# Altium PCB UPCNSL_ABS_RF_POL.PcbDoc
Units mm, origin at the board's own origin, x right, y up, seen from the top; angles counter-clockwise.
Board outline 40 x 40 mm, 2 copper layers (Top Layer, Bottom Layer); 24 components, 15 nets, 81 pads, 49 vias.
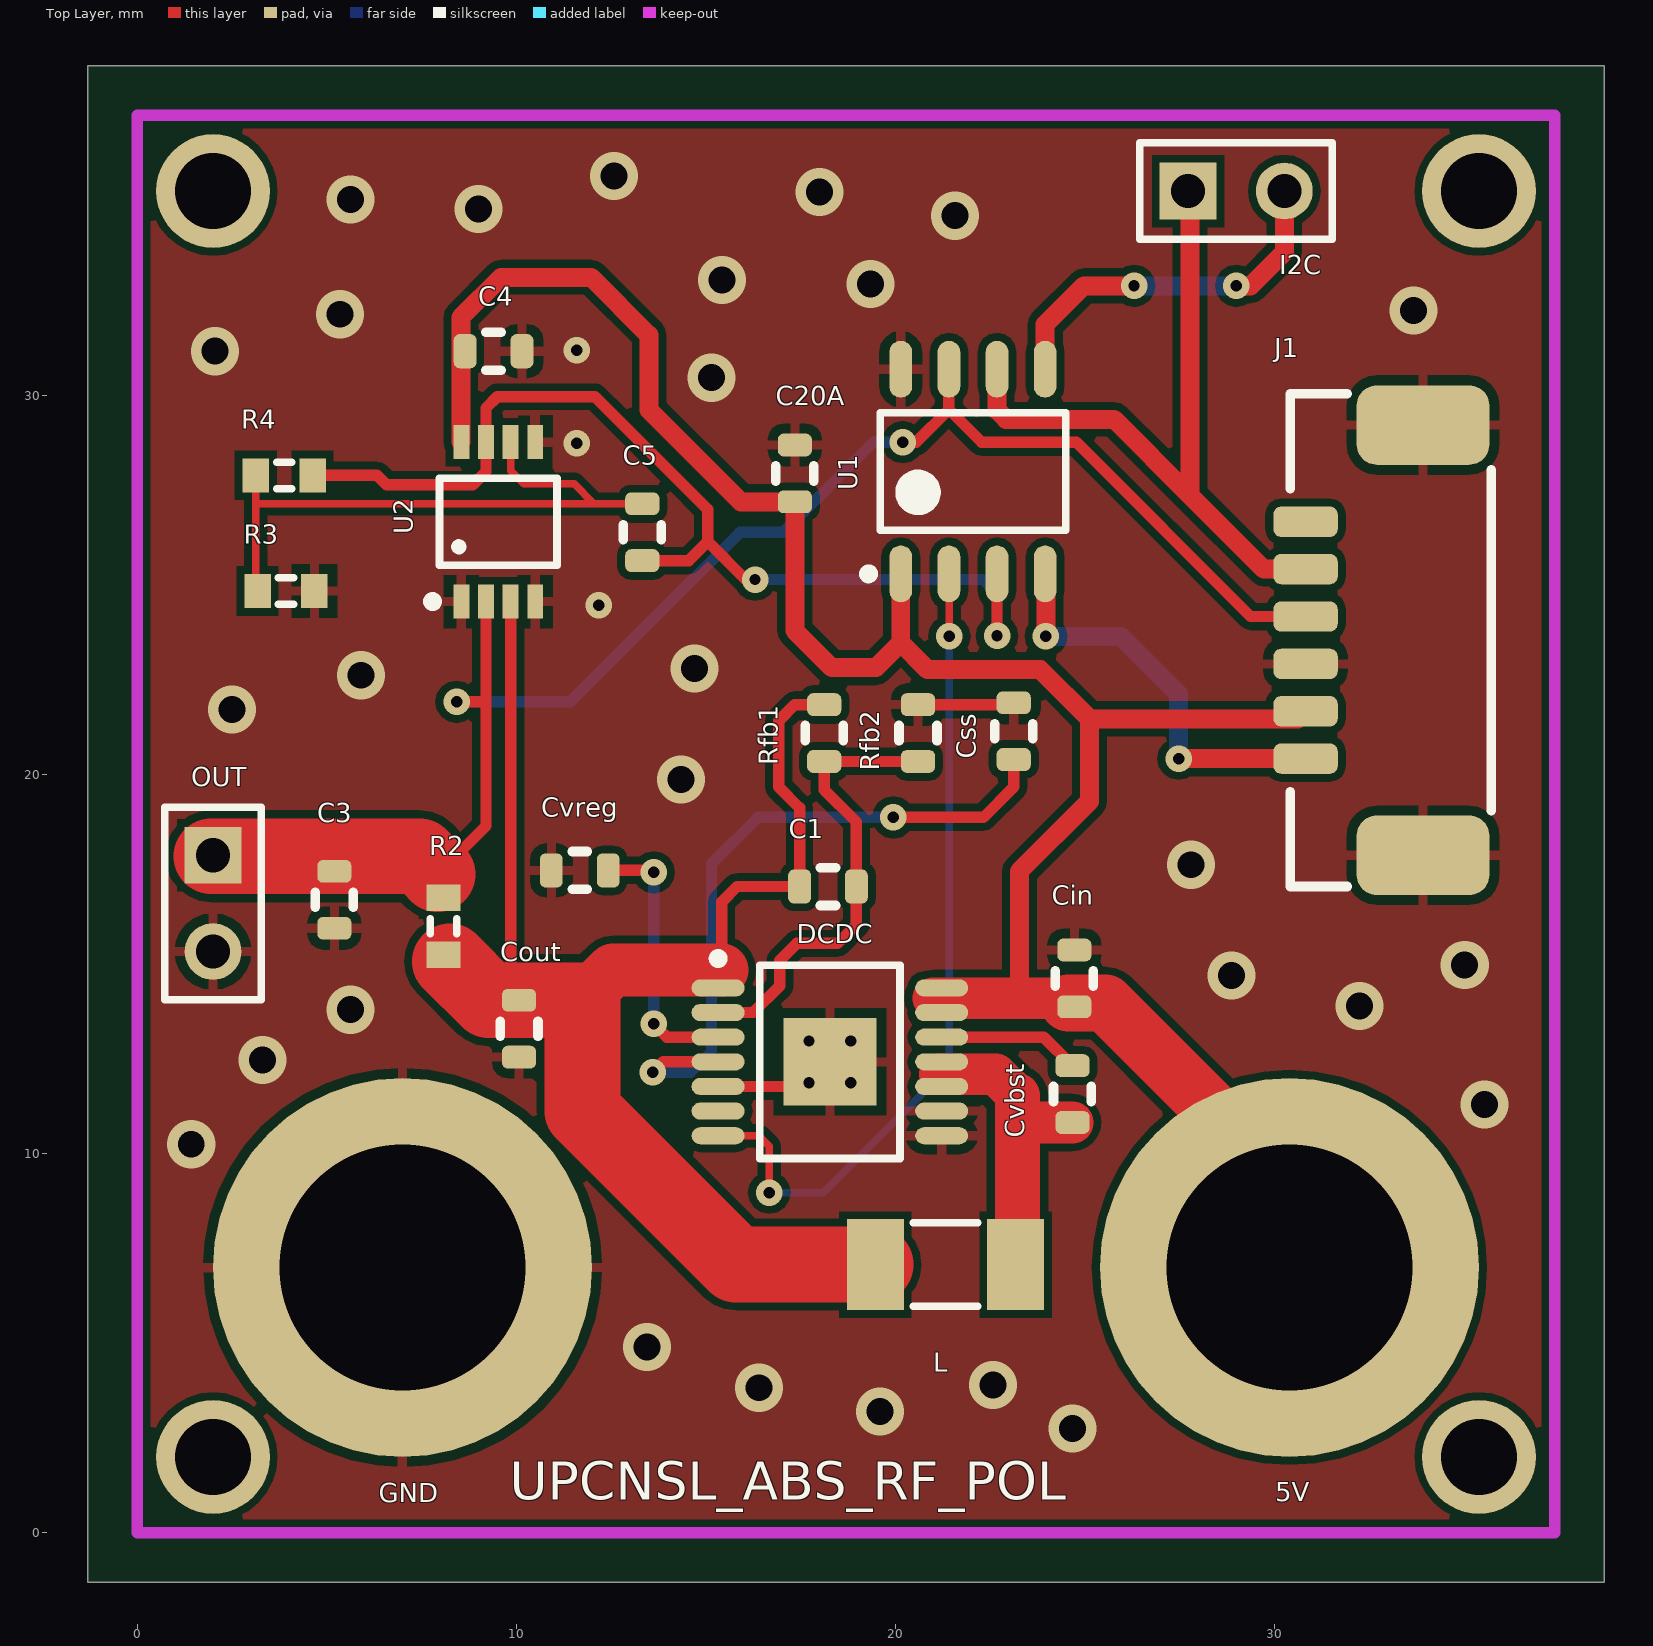
[diagram p0: Top Layer view]
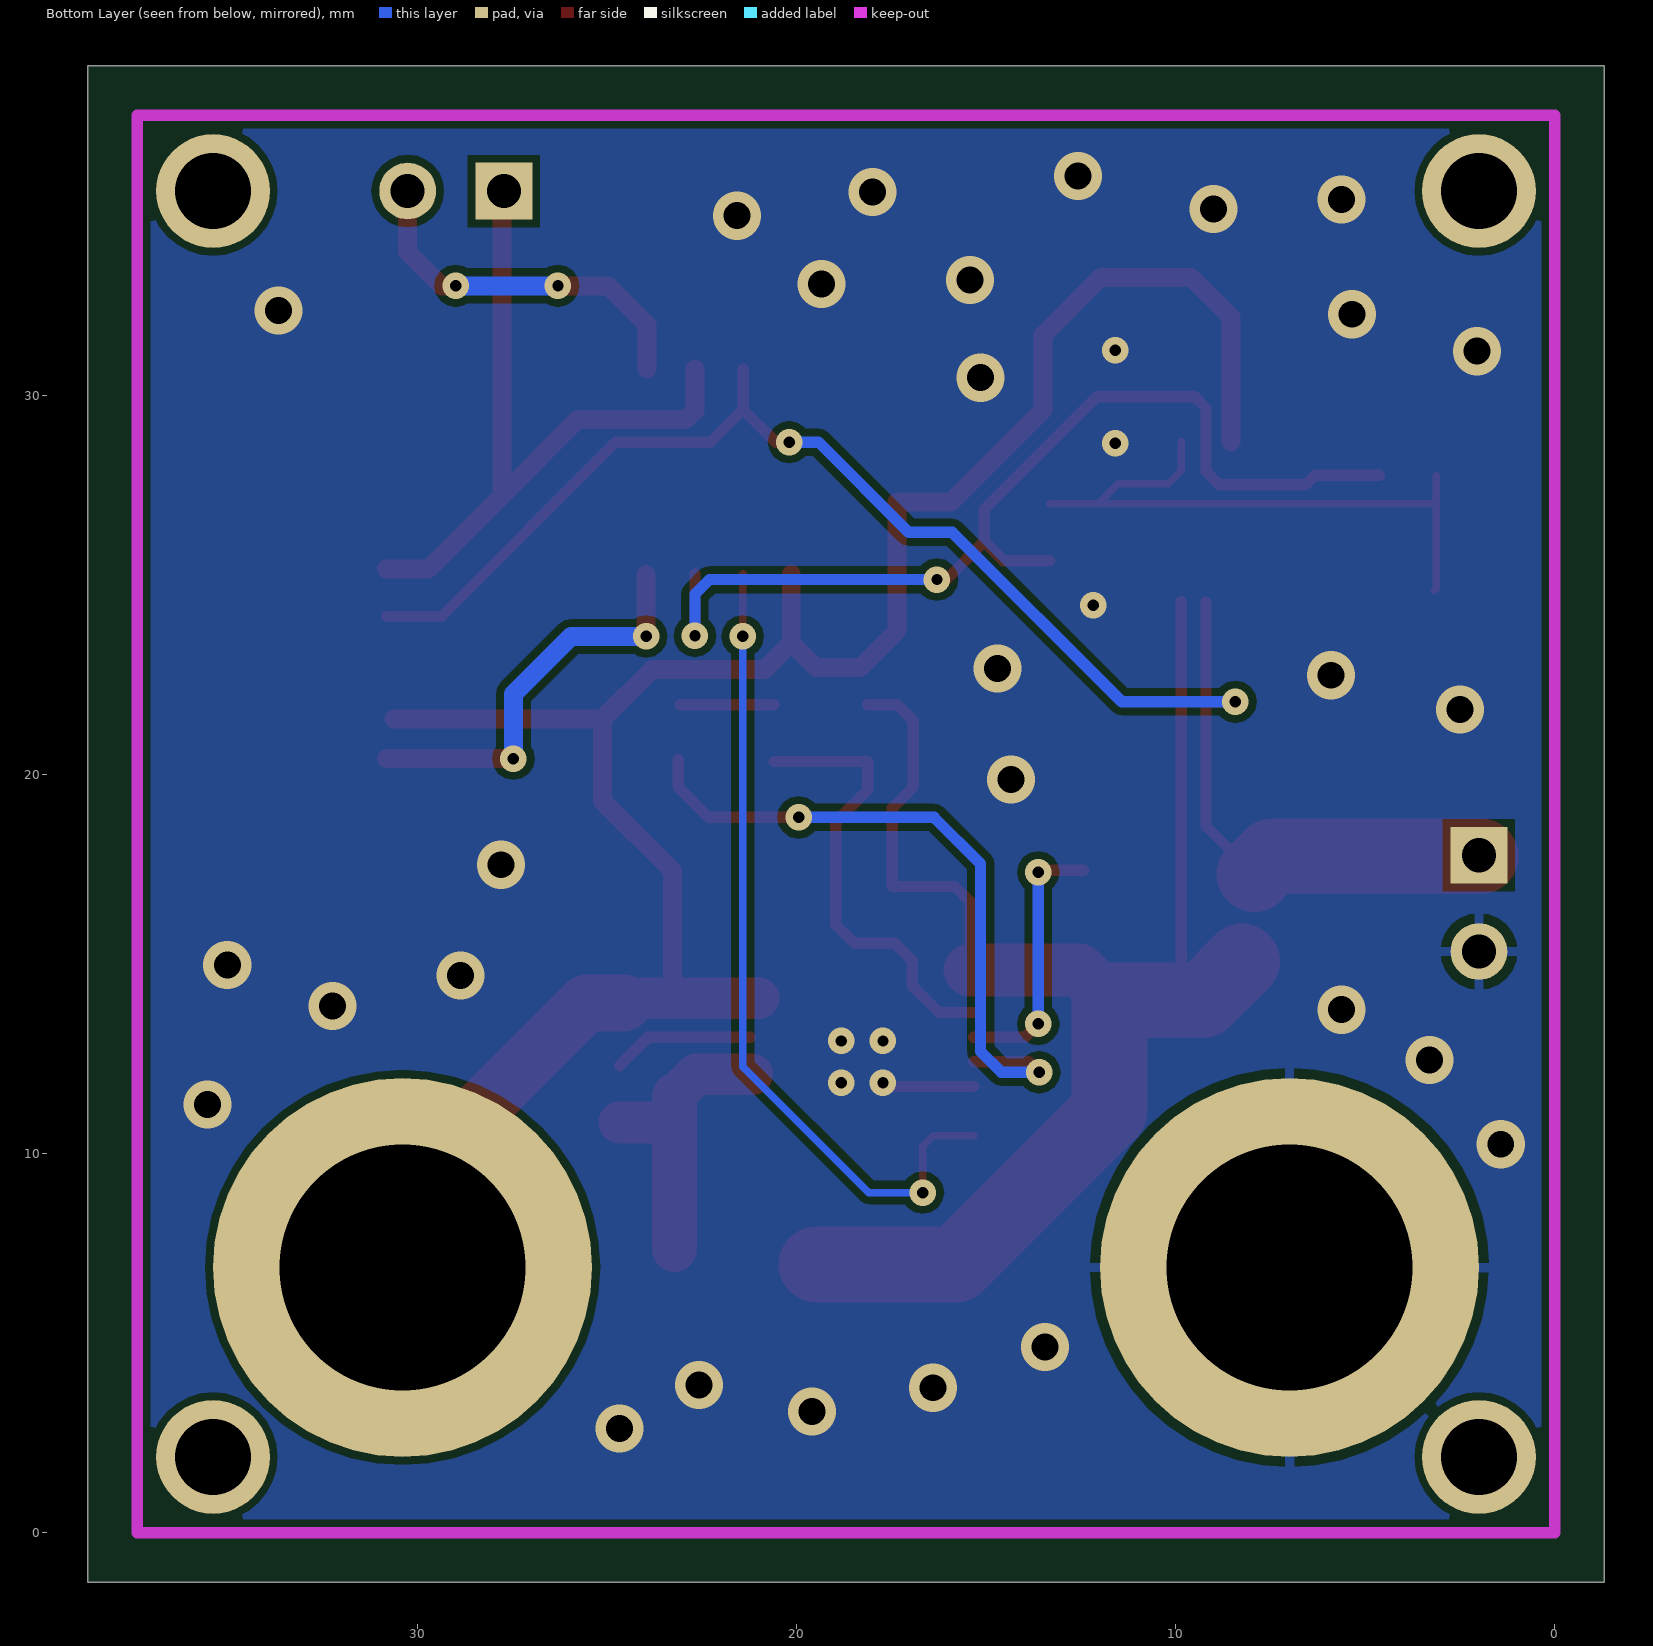
[diagram p1: Bottom Layer view, seen from below]
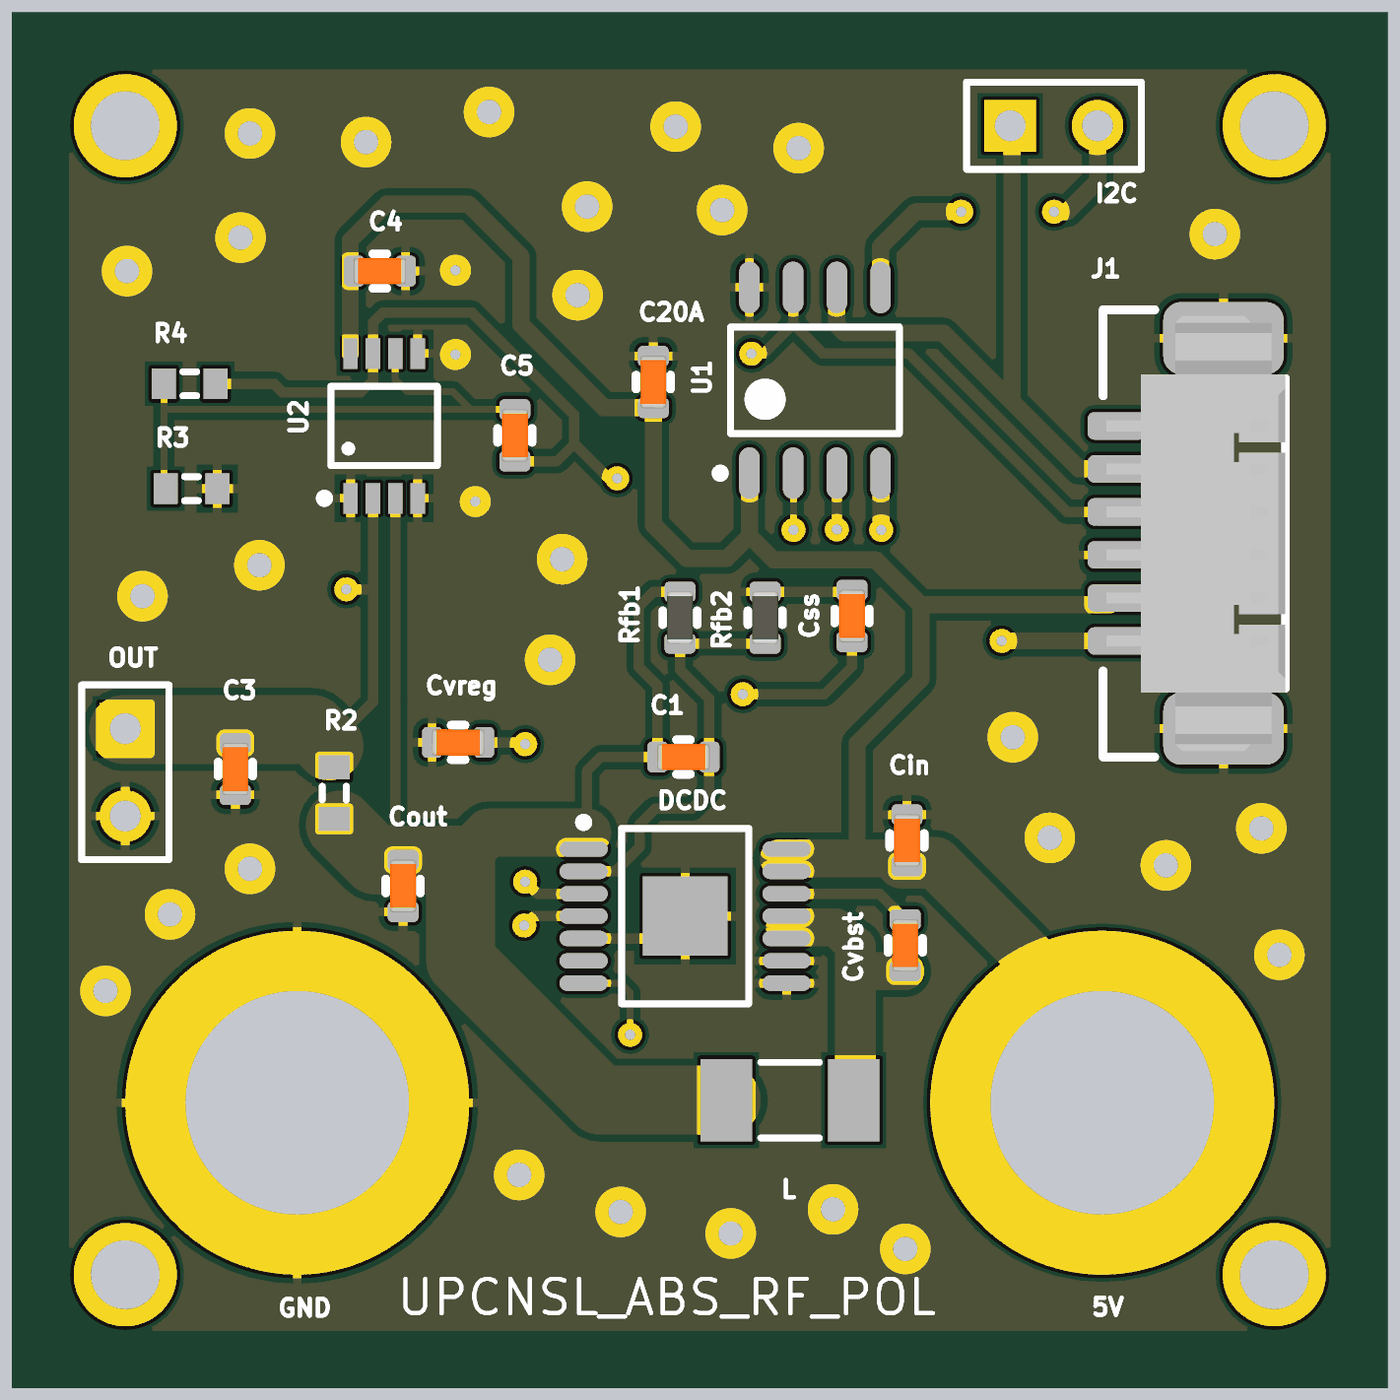
[diagram p2: 3D render of the assembled board from above, using the file's embedded part models]

## Layer stack, top to bottom
Top Solder: solder mask 0.0102, Solder Resist, Dk 3.5
Top Layer: signal copper 0.0356
Dielectric 1: dielectric 0.32, FR-4, Dk 4.8
Bottom Layer: signal copper 0.0356
Bottom Solder: solder mask 0.0102, Solder Resist, Dk 3.5

## Board outline
-1.3,-1.3 38.7,-1.3 38.7,38.7 -1.3,38.7

## Design rules (kind name [scope] priority, off if disabled: settings)
Clearance [All] p1: gap=0.2
HoleSize [All] p1: absolutevalues=TRUE maxlimit=10 minlimit=0.025 maxpercent=80.000 minpercent=20.000
MinimumSolderMaskSliver [All] p1: minsoldermaskwidth=0.1
PolygonConnect VIAGND [IsVia vs InNet('GND')] p1: connectstyle=Direct reliefconductorwidth=0.254 reliefentries=4 polygonreliefangle="90 Angle" airgapwidth=0.254
PolygonConnect PolygonConnect_1 [All] p2: connectstyle=Relief reliefconductorwidth=0.254 reliefentries=4 polygonreliefangle="90 Angle" airgapwidth=0.254
RoutingVias [All] p1: holewidth=0.2 width=1 viastyle="Through Hole" minholewidth=0.2 minwidth=0.4 maxholewidth=3 maxwidth=6
SilkToSolderMaskClearance [IsPad] p1: minsilkscreentomaskgap=0.075 clearancetoexposedcopper=TRUE
SolderMaskExpansion [All] p1: expansion=0.102
UnpouredPolygon [All] p1: allowunpoured=FALSE
Width [All] p1: maxlimit=2 minlimit=0.2 preferedwidth=0.2
26 further rules are at their usual default settings.

## Components (designator, comment, footprint, x,y, rotation, side; value= is the part's Value field where it differs from the comment)
5V "Banana" Banana#1 18.125,7.35 r0 top
C1 "CAP0603" CAP0603 18.225,17.05 r180 top
C3 "CAP0603" CAP0603 5.2,16.7 r270 top
C4 "CAP0603" CAP0603 9.4,31.175 r180 top
C5 "CAP0603" CAP0603 13.325,26.4 r90 top
C20A "Cap Semi" CAP0603 17.35,27.95 r90 top
Cin "CAP0603" CAP0603 24.725,14.625 r270 top
Cout "CAP0603" CAP0603 10.075,13.3 r90 top
Css "CAP0603" CAP0603 23.125,21.15 r270 top
Cvbst "CAP0603" CAP0603 24.675,11.575 r270 top
Cvreg "CAP0603" CAP0603 11.675,17.475 r0 top
DCDC "TPS54325" TPS54325 18.275,12.425 r0 top
GND "Banana" Banana#2 29.775,6.9 r0 top
I2C "Header 2" HDR1X2 27.725,35.4 r0 top
J1 "532610671" 532610671 33.925,23.55 r90 top (schematic designator J1A)
L "2.2uH" L_DCDC_TPS54325_v2 21.325,7.075 r180 top
OUT "Header 2" HDR1X2 2,17.875 r270 top locked
R2 "Res3" J1-0603 8.075,16 r270 top
R3 "Res3" J1-0603 3.925,24.85 r0 top
R4 "Res3" J1-0603 3.875,27.9 r180 top
Rfb1 "RES0603" RES0603 18.125,21.1 r90 top
Rfb2 "RES0603" RES0603 20.6,21.1 r270 top
U1 "PIC12F1822" PIC12F1822 22.05,28 r90 top
U2 "LTC2053" "LTC2053 IPC" 9.525,26.675 r90 top

## Footprints (in the part's own frame and the unit in brackets; to place one, negate y for a bottom-side part, rotate by r counter-clockwise, add the part's x,y. Pads: shape width x height; smd on the part's side, far side on the other; paste and mask are expansions set on the pad)
532610671 [mm] "MACHO, ACODADO, SMT, 6 VÍAS"
  rrect50% 2.1x3.5 smd: 0(-5.675,0) 0(5.675,0)
  rrect50% 0.8x1.7 smd: 1(-3.125,3.1) 2(-1.875,3.1) 3(-0.625,3.1) 4(0.625,3.1) 5(1.875,3.1) 6(3.125,3.1)
  silkscreen extent -6.5,-1.8 6.5,3.5, body extent -6.32,-1.8 6.32,3.4, height 3.4
Banana#1 [mm]
  round 10 hole 6.5: 1(12.275,-0.35)
Banana#2 [mm]
  round 10 hole 6.5: 1(-22.775,0.1)
CAP0603 [mm] "Capacitor Chip Inductor, Body 0.6x0.3mm, IPC High Density"
  rrect50% 0.6x0.9 smd: 1(-0.75,0) 2(0.75,0)
  silkscreen extent -0.2,-0.5 0.2,0.5, body extent -0.76,-0.38 0.76,0.38, height 0.76
HDR1X2 [mm] "Connector; Header; 2 Position"
  rect 1.5x1.5 hole 0.9: 1(0,0)
  round 1.5 hole 0.9: 2(2.54,0)
  silkscreen extent -1.27,-1.27 3.81,1.27
J1-0603 [mm] "Chip Resistor, Body 1.6x0.8mm, IPC High Density"
  rect 0.7x0.9 smd: 1(-0.75,0) 2(0.75,0)
  silkscreen extent -0.2,-0.35 0.2,0.35, body extent -0.85,-0.48 0.85,0.48, height 0.9
L_DCDC_TPS54325_v2 [mm] "Chip Inductor, 2-Leads, Body 5,00x5,00mm, IPC Medium Density"
  rect 1.5x2.4 smd: 1(-1.85,0) 2(1.85,0)
  silkscreen extent -0.85,-1.1 0.85,1.1, body extent -2.35,-2.15 2.35,2.15, height 2
"LTC2053 IPC" [mm] "TSOP, 8-Leads, Body 3,00x3,00mm, Pitch 0,65mm, IPC Medium Density"
  rect 0.889x0.42 smd: 1(-2.105,0.975) 2(-2.105,0.325) 3(-2.105,-0.325) 4(-2.105,-0.975) 5(2.105,-0.975) 6(2.105,-0.325) 7(2.105,0.325) 8(2.105,0.975)
  silkscreen extent -2.23,-1.55 1.15,1.86, body extent -1.55,-1.55 1.55,1.55, height 1.1
PIC12F1822 [mm]
  oval 1.5x0.6 smd: 1(-2.7,1.905) 2(-2.7,0.635) 3(-2.7,-0.635) 4(-2.7,-1.905) 5(2.7,-1.905) 6(2.7,-0.635) 7(2.7,0.635) 8(2.7,1.905)
  silkscreen extent -2.82,-2.45 1.55,2.88, body extent -1.95,-2.45 1.95,2.45, height 1.75
RES0603 [mm] "Resistor Chip Inductor, Body 0.6x0.3mm, IPC High Density"
  rrect50% 0.6x0.9 smd: 1(-0.75,0) 2(0.75,0)
  silkscreen extent -0.2,-0.5 0.2,0.5, body extent -0.76,-0.38 0.76,0.38, height 0.76
TPS54325 [mm]
  oval 1.4x0.45 smd: 1(-2.95,1.95) 2(-2.95,1.3) 3(-2.95,0.65) 4(-2.95,0) 5(-2.95,-0.65) 6(-2.95,-1.3) 7(-2.95,-1.95) 8(2.95,-1.95) 9(2.95,-1.3) 10(2.95,-0.65) 11(2.95,0) 12(2.95,0.65) 13(2.95,1.3) 14(2.95,1.95)
  rect 2.46x2.31 smd: 15(0,0)
  silkscreen extent -3.07,-2.55 1.85,2.85, body extent -2.25,-2.55 2.25,2.55, height 1.2

## Part data
C1 C3 C4 C5 Cin Cout Css Cvbst Cvreg: "Capacitor"
C20A: "Capacitor (Semiconductor SIM Model)"
I2C OUT: "Header, 2-Pin"
J1: library part MOLEX_532610671, "1.25mm Pitch PicoBlade™ Header, Surface Mount, Right Angle, Lead-Free, 6 Circuits"
L: library part L_DCDC_TPS54325
R2 R3 R4 Rfb1 Rfb2: "Resistor"

## Free pads (board coordinates)
  round 3 hole 2: 0(2,2) 0(2,35.4) 0(35.4,2) 0(35.4,35.4)

## Via types
v1: diameter 1.27, hole 0.711, Top Layer to Bottom Layer, 28 vias
v2: diameter 0.7, hole 0.3, Top Layer to Bottom Layer, 21 vias

## Nets (pads, with @x,y where several pads share a name; then routed paths per layer and width w, separated by ;. In a path a pad name is that pad's centre, name@x,y a point inside that pad or via, vN(x,y) a via of type N, cw(c..) or ccw(c..) an arc to the next point about the centre after c; other vN are vias at no path point)
CURRENTOUT: C5.1 R4.1 U1.3 U2.7 | length 27.6
  Top Layer w0.3: R4.1 6.325,27.9 6.575,27.65 8.85,27.65 9.2,28 U2.7 9.2,29.675 9.5,29.975 12.075,29.975 15.05,27 15.05,26.15 ; C5.1 14.55,25.65 15.05,26.15 ; v2(16.3,25.15) 16.05,25.15 15.05,26.15 ; v2(22.685,23.665) U1.3
  Bottom Layer w0.3: v2@16.125,25.15 v2(16.3,25.15) 22.3,25.15 22.685,24.765 v2(22.685,23.665)
ENABLE: DCDC.7 U1.2 | length 21.9
  Top Layer w0.2: DCDC.7 16.4,10.475 16.675,10.2 v2(16.675,8.975) ; U1.2 21.5,25.215 21.425,25.14 v2(21.425,23.65)
  Bottom Layer w0.2: v2(16.675,8.975) 18.1,8.975 21.425,12.3 v2(21.425,23.65)
GND: C3.2 C4.1 C20A.2 Cin.1 Cout.1 Css.1 Cvreg.1 DCDC.5 DCDC.8 DCDC.9 DCDC.15 GND.1 J1.0 J1.3 OUT.2 R3.2 Rfb2.1 U1.8 U2.1 U2.4 U2.5 | length 4.8
  Top Layer w0.3: DCDC.5 DCDC.15@17.625,11.775 ; Rfb2.1 Css.1@23.075,21.85
  other v1: 24.675,2.75 19.6,3.2 16.4,3.825 22.575,3.9 13.45,4.9 1.425,10.25 35.55,11.3 3.3,12.475 5.625,13.8 32.25,13.9 28.875,14.7 35.025,14.975 27.8,17.625 14.35,19.875 2.5,21.725 5.9,22.625 14.7,22.8 15.15,30.475 2.05,31.175 5.35,32.15 33.675,32.25 19.35,32.95 15.425,33.05 21.575,34.75 9,34.925 5.625,35.175 18,35.375 12.575,35.8
  other v2: 17.725,11.875 18.825,11.875 17.725,12.975 18.825,12.975 12.175,24.475 11.6,28.75 11.6,31.2
IN_5V: 5V.1 C4.2 C20A.1 Cin.2 DCDC.13 DCDC.14 J1.2 U1.1 U2.8 | length 56.4
  Top Layer w0.5: U2.8@8.54,28.781 8.54,32.065 9.6,33.125 11.975,33.125 13.5,31.6 13.5,29.625 15.925,27.2 C20A.1 17.35,23.8 18.325,22.825 19.49,22.825 20.145,23.48 ; U1.1 20.145,23.48 ; 23.275,14.1 23.275,17.45 25.125,19.3 25.125,21.475 ; J1.2@30.625,21.475 25.125,21.475 ; 20.145,23.48 20.85,22.775 23.825,22.775 25.125,21.475
  Top Layer w1.1: 21,14.1 23.275,14.1 Cin.2@24.575,14.1 ; 5V.1@30.4,8.373 5V.1@30.4,9.125
  Top Layer w1.5: Cin.2@24.575,13.975 25.55,13.975 5V.1@30.4,9.125
NetC5_2: C5.2 R3.1 R4.2 U2.6 | length 16.6
  Top Layer w0.2: R4.2 3.125,27.15 ; R3.1 3.125,24.9 3.125,27.15 ; U2.6 9.85,28.025 10.2,27.675 11.525,27.675 12.05,27.15 ; C5.2 12.05,27.15 ; 3.125,27.15 12.05,27.15
NetCss_2: Css.2 DCDC.4 | length 18.1
  Top Layer w0.3: v2(13.6,12.15) 13.875,12.425 DCDC.4 ; v2(19.95,18.875) 22.325,18.875 23.125,19.675 Css.2
  Bottom Layer w0.3: v2(13.6,12.15) 14.6,12.15 15.15,12.7 15.15,17.65 16.375,18.875 v2(19.95,18.875)
NetCvreg_2: Cvreg.2 DCDC.3 | length 7
  Top Layer w0.3: Cvreg.2 v2@13.575,17.475 ; v2(13.625,13.425) 13.975,13.075 DCDC.3
  Bottom Layer w0.3: v2(13.625,13.425) v2(13.625,17.425)
OUT_3.3V: C3.1 J1.4 OUT.1 R2.1 U1.7 U2.2 | length 43.6
  Top Layer w0.3: 7.925,17.375 9.2,18.65 9.2,21.925 ; v2(8.425,21.925) 9.2,21.925 ; U2.2 9.2,21.925 ; v2(20.2,28.775) 20.555,28.775 21.415,29.635 ; U1.7 21.415,29.635 ; J1.4 29.375,24.175 24.775,28.775 22.275,28.775 21.415,29.635
  Top Layer w2: OUT.1@1.95,17.85 7.45,17.85 7.925,17.375
  Bottom Layer w0.3: v2(8.425,21.925) 11.425,21.925 15.9,26.4 17.05,26.4 19.425,28.775 v2(20.2,28.775)
RA3: J1.1 U1.4 | length 10.8
  Top Layer w0.5: v2(23.975,23.65) U1.4@23.975,25.28 ; v2(27.475,20.425) J1.1
  Bottom Layer w0.5: v2(23.975,23.65) 25.95,23.65 27.475,22.125 v2(27.475,20.425)
SCL: I2C.1 J1.5 U1.6 | length 18.9
  Top Layer w0.5: U1.6 22.685,29.615 22.925,29.375 25.775,29.375 27.775,27.375 ; I2C.1@27.775,35.35 27.775,27.375 ; J1.5 29.725,25.425 27.775,27.375
SDA: I2C.2 U1.5 | length 9.9
  Top Layer w0.5: U1.5 23.955,31.88 24.975,32.9 v2(26.3,32.9) ; v2(29,32.9) 29.375,32.9 30.265,33.79 I2C.2
  Bottom Layer w0.5: v2(26.3,32.9) v2(29,32.9)
SW1: Cvbst.2 DCDC.10 DCDC.11 L.1 | length 7.7
  Top Layer w1.1: 21.175,12.1 22.65,12.1 23.225,11.525 ; 23.3,10.825 Cvbst.2
  Top Layer w1.2: L.1@23.225,7.475 23.225,11.525
VBST: Cvbst.1 DCDC.12 | length 3.8
  Top Layer w0.3: DCDC.12 23.919,13.075 Cvbst.1@24.669,12.325
VFB: C1.1 DCDC.2 Rfb1.1 Rfb2.2 | length 12.1
  Top Layer w0.3: DCDC.2 16.25,13.725 16.95,14.425 16.95,15.1 17.4,15.55 18.475,15.55 18.975,16.05 C1.1 18.975,18.75 18.125,19.6 Rfb1.1 Rfb2.2
VO: C1.2 Cout.2 DCDC.1 L.2 R2.2 Rfb1.2 U2.3 | length 40.5
  Top Layer w0.3: Cout.2@9.85,14.275 U2.3 ; 15.425,14.85 15.425,16.65 15.825,17.05 C1.2 17.475,19.125 16.925,19.675 16.925,21.425 17.35,21.85 Rfb1.2
  Top Layer w1.4: 11.75,14.05 12.55,14.85 15.425,14.85
  Top Layer w2: R2.2@8.25,15.075 9.275,14.05 Cout.2 11.75,14.05 11.75,11.125 15.8,7.075 L.2
pads on no net: DCDC.6 J1.6

## Polygon pours and split planes (outlines as drawn)
GND on Top Layer "Top Layer-No Net" (solid, pour order 4): 37.225,37.225 37.225,0.175 0.175,0.175 0.175,37.225
GND on Bottom Layer "Top Layer-No Net" (solid, pour order 2): 0.175,37.225 0.175,0.175 37.225,0.175 37.225,37.225

## Keep-outs
Keep-Out Layer:
  lines w0.3: 0,0 37.4,0 37.4,37.4 0,37.4 0,0

## Silkscreen, mask and mechanical layers (free items; w line width, h text height)
Top Overlay:
  text "UPCNSL_ABS_RF_POL" at 9.825,0.875 h1